# EAGLE board MainBoard_V4 (EAGLE 6.1)
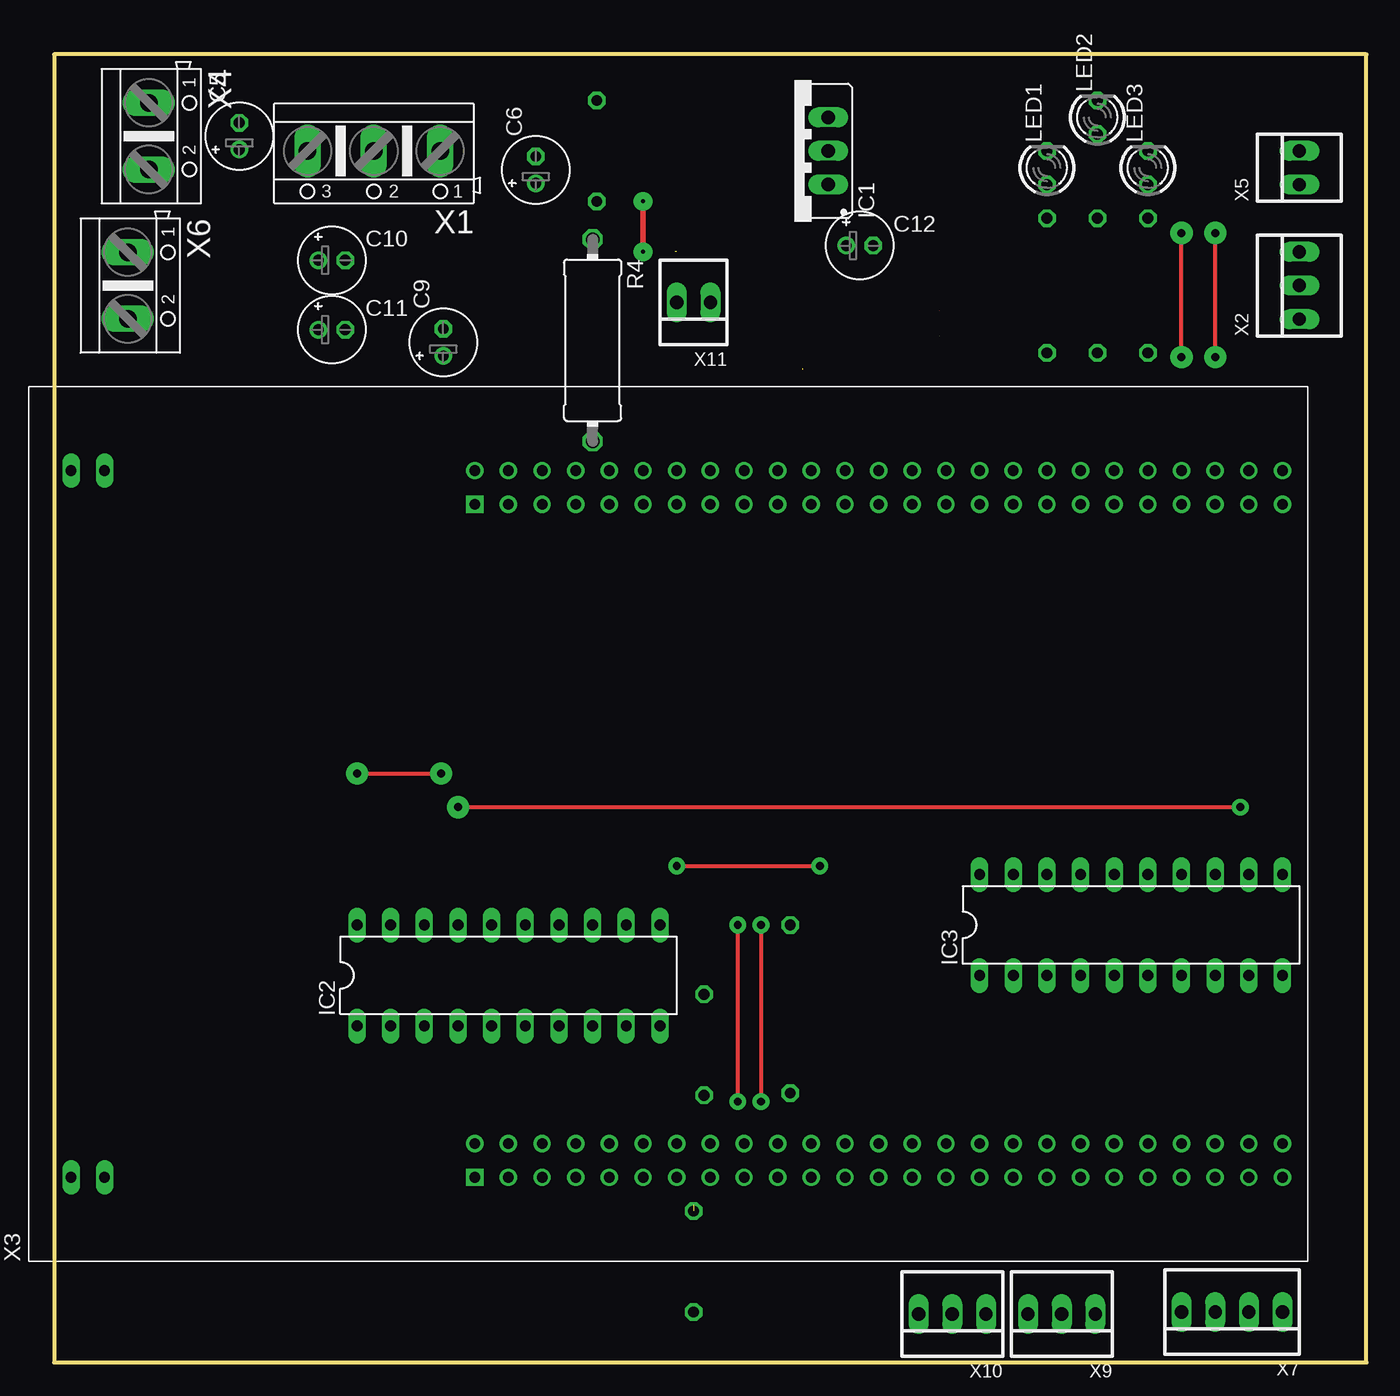
[diagram p0: board, top side]
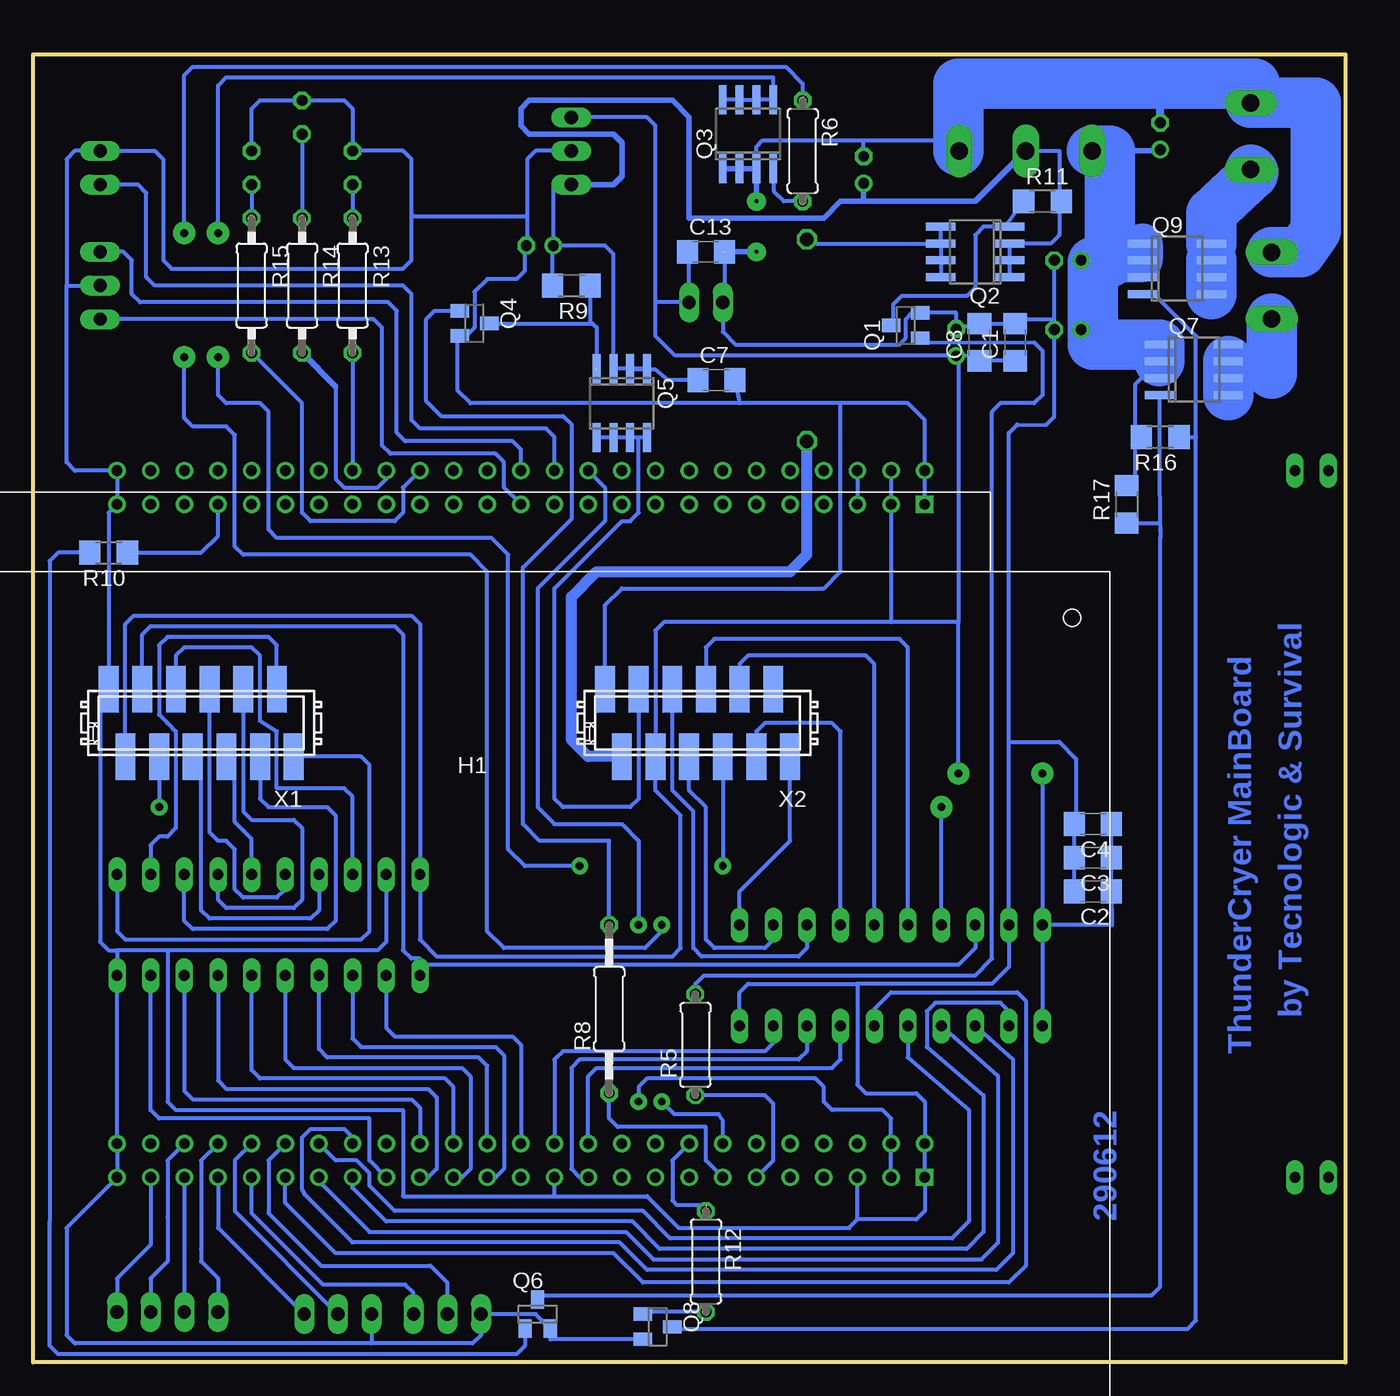
[diagram p1: board, bottom side, seen from below]

Size 99.04 x 98.73 mm. Coordinates in mm from the lower left corner, seen from the top.
Outline: 0,0 99.04,0 99.04,98.73 0,98.73 0,0
Copper layers (1*16): Top 0.035mm / dielectric 1.5mm / Bottom 0.035mm
Design rules: minimum track width 6mil, minimum drill 12mil, track to track 6mil, track to pad 6mil, pad to pad 6mil, via to via 6mil, smd to smd 0mil, copper to edge 10mil, drill to drill 10mil, minimum pad ring 10mil, minimum via ring 6mil, stop-mask expansion 2mil, vias tented up to drill 100mil, thermal gap 10mil

## Footprints (pad centres in the part's own frame; a part is rotated, then mirrored left to right if it is on the bottom)
C1206 = smd 1.6 x 1.8: 1 -1.4,0; 2 1.4,0
E2-5 = drill 0.813 pad 1.27: + -1.016,0 | drill 0.813 pad 1.27 octagon: - 1.016,0
YL24012-70-MICROMATCH = smd 1.5 x 3.5: 1 75.565,8.89; 2 74.295,13.97; 3 73.025,8.89; 4 71.755,13.97; 5 70.485,8.89; 6 69.215,13.97; 7 67.945,8.89; 8 66.675,13.97; 9 65.405,8.89; 10 64.135,13.97; 11 62.865,8.89; 12 61.595,13.97; 13 38.1,8.89; 14 36.83,13.97; 15 35.56,8.89; 16 34.29,13.97; 17 33.02,8.89; 18 31.75,13.97; 19 30.48,8.89; 20 29.21,13.97; 21 27.94,8.89; 22 26.67,13.97; 23 25.4,8.89; 24 24.13,13.97
78XXS = drill 1.016 long: GND 0,-2.54; IN -2.54,-2.54; OUT 2.54,-2.54
DIL20 = drill 0.813 long: 1 -11.43,-3.81; 2 -8.89,-3.81; 3 -6.35,-3.81; 4 -3.81,-3.81; 5 -1.27,-3.81; 6 1.27,-3.81; 7 3.81,-3.81; 8 6.35,-3.81; 9 8.89,-3.81; 10 11.43,-3.81; 11 11.43,3.81; 12 8.89,3.81; 13 6.35,3.81; 14 3.81,3.81; 15 1.27,3.81; 16 -1.27,3.81; 17 -3.81,3.81; 18 -6.35,3.81; 19 -8.89,3.81; 20 -11.43,3.81
LED3MM = drill 0.813 octagon: A -1.27,0; K 1.27,0
SOT23 = smd 1 x 1.4: 1 -0.95,-1.1; 2 0.95,-1.1; 3 0,1.1
SO-08 = smd 0.6 x 2.2: 1 -1.905,-2.6; 2 -0.635,-2.6; 3 0.635,-2.6; 4 1.905,-2.6; 5 1.905,2.6; 6 0.635,2.6; 7 -0.635,2.6; 8 -1.905,2.6
0414/15 = drill 1.016 octagon: 1 -7.62,0; 2 7.62,0
0207/7 = drill 0.813 octagon: 1 -3.81,0; 2 3.81,0
0207/12 = drill 0.813 octagon: 1 -6.35,0; 2 6.35,0
R1206 = smd 1.6 x 1.803: 1 -1.422,0; 2 1.422,0
0207/10 = drill 0.813 octagon: 1 -5.08,0; 2 5.08,0
AK500/3 = drill 1.321 long: 1 -5.004,0; 2 0,0; 3 5.004,0
22-23-2031 = drill 1 long: 1 -2.54,0; 2 0,0; 3 2.54,0
STM32F4_DISC = drill 0.8 square: L1 -27.94,30.48; R1 22.86,30.48 | drill 0.8: L2 -25.4,30.48; L3 -27.94,27.94; L4 -25.4,27.94; L5 -27.94,25.4; L6 -25.4,25.4; L7 -27.94,22.86; L8 -25.4,22.86; L9 -27.94,20.32; L10 -25.4,20.32; L11 -27.94,17.78; L12 -25.4,17.78; L13 -27.94,15.24; L14 -25.4,15.24; L15 -27.94,12.7; L16 -25.4,12.7; L17 -27.94,10.16; L18 -25.4,10.16; L19 -27.94,7.62; L20 -25.4,7.62; L21 -27.94,5.08; L22 -25.4,5.08; L23 -27.94,2.54; L24 -25.4,2.54; L25 -27.94,0; L26 -25.4,0; L27 -27.94,-2.54; L28 -25.4,-2.54; L29 -27.94,-5.08; L30 -25.4,-5.08; L31 -27.94,-7.62; L32 -25.4,-7.62; L33 -27.94,-10.16; L34 -25.4,-10.16; L35 -27.94,-12.7; L36 -25.4,-12.7; L37 -27.94,-15.24; L38 -25.4,-15.24; L39 -27.94,-17.78; L40 -25.4,-17.78; L41 -27.94,-20.32; L42 -25.4,-20.32; L43 -27.94,-22.86; L44 -25.4,-22.86; L45 -27.94,-25.4; L46 -25.4,-25.4; L47 -27.94,-27.94; L48 -25.4,-27.94; L49 -27.94,-30.48; L50 -25.4,-30.48; R2 25.4,30.48; R3 22.86,27.94; R4 25.4,27.94; R5 22.86,25.4; R6 25.4,25.4; R7 22.86,22.86; R8 25.4,22.86; R9 22.86,20.32; R10 25.4,20.32; R11 22.86,17.78; R12 25.4,17.78; R13 22.86,15.24; R14 25.4,15.24; R15 22.86,12.7; R16 25.4,12.7; R17 22.86,10.16; R18 25.4,10.16; R19 22.86,7.62; R20 25.4,7.62; R21 22.86,5.08; R22 25.4,5.08; R23 22.86,2.54; R24 25.4,2.54; R25 22.86,0; R26 25.4,0; R27 22.86,-2.54; R28 25.4,-2.54; R29 22.86,-5.08; R30 25.4,-5.08; R31 22.86,-7.62; R32 25.4,-7.62; R33 22.86,-10.16; R34 25.4,-10.16; R35 22.86,-12.7; R36 25.4,-12.7; R37 22.86,-15.24; R38 25.4,-15.24; R39 22.86,-17.78; R40 25.4,-17.78; R41 22.86,-20.32; R42 25.4,-20.32; R43 22.86,-22.86; R44 25.4,-22.86; R45 22.86,-25.4; R46 25.4,-25.4; R47 22.86,-27.94; R48 25.4,-27.94; R49 22.86,-30.48; R50 25.4,-30.48 | drill 0.8 long: T1 -27.94,60.96; T2 -27.94,58.42; T3 25.4,60.96; T4 25.4,58.42
AK500/2 = drill 1.321 long: 1 -2.515,0; 2 2.515,0
22-23-2021 = drill 1 long: 1 -1.27,0; 2 1.27,0
22-23-2041 = drill 1 long: 1 -3.81,0; 2 -1.27,0; 3 1.27,0; 4 3.81,0

## Placement (x,y rotation side)
C1  100n  [C1206]  24.92,76.99 90 bottom
C2  100n  [C1206]  19.05,35.56 180 bottom
C3  100n  [C1206]  19.05,38.1 180 bottom
C4  100n  [C1206]  19.05,40.64 180 bottom
C5  10µ  [E2-5]  13.97,92.55 90 top
C6  4µ7  [E2-5]  36.35,90.01 90 top
C7  100n  [C1206]  47.47,74.14 0 bottom
C8  100n  [C1206]  27.62,76.99 90 bottom
C9  4µ7  [E2-5]  29.37,76.99 90 top
C10  100µ  [E2-5]  20.95,83.19 0 top
C11  100µ  [E2-5]  20.95,77.95 0 top
C12  100µ  [E2-5]  60.8,84.3 0 top
C13  100n  [C1206]  48.26,83.82 0 bottom
H1  [YL24012-70-MICROMATCH]  17.78,59.69 180 bottom
IC1  78L05  [78XXS]  55.88,91.44 90 top
IC2  74AC245N  [DIL20]  34.29,29.21 0 top
IC3  74AC245N  [DIL20]  81.28,33.02 0 top
LED1  [LED3MM]  74.93,90.17 90 top
LED2  [LED3MM]  78.74,93.98 90 top
LED3  [LED3MM]  82.55,90.17 90 top
Q1  BSS123  [SOT23]  33.18,78.26 90 bottom
Q2  SI4427DY  [SO-08]  27.94,83.82 90 bottom
Q3  SI4466DY  [SO-08]  45.09,92.71 0 bottom
Q4  BSS123  [SOT23]  65.72,78.42 270 bottom
Q5  SI4427DY  [SO-08]  54.61,72.39 180 bottom
Q6  BSS123  [SOT23]  60.96,3.65 0 bottom
Q7  SI4427DY  [SO-08]  11.43,74.93 270 bottom
Q8  BSS123  [SOT23]  51.91,2.7 270 bottom
Q9  SI4427DY  [SO-08]  12.7,82.55 270 bottom
R4  10R  [0414/15]  40.64,77.15 270 top
R5  1k  [0207/7]  49.05,23.97 90 bottom
R6  1k  [0207/7]  40.96,91.44 270 bottom
R8  1k  [0207/12]  55.56,26.67 90 bottom
R9  1k  [R1206]  58.42,81.28 180 bottom
R10  1k  [R1206]  93.34,61.12 180 bottom
R11  1k  [R1206]  22.86,87.63 0 bottom
R12  1k  [0207/7]  48.26,7.62 270 bottom
R13  1k  [0207/10]  74.93,81.28 270 bottom
R14  1k  [0207/10]  78.74,81.28 270 bottom
R15  1k  [0207/10]  82.55,81.28 270 bottom
R16  10k  [R1206]  13.97,69.85 180 bottom
R17  10k  [R1206]  16.51,64.77 90 bottom
X1  PWR  [AK500/3]  24.13,91.44 180 top
X2  22-23-2031  [22-23-2031]  93.98,81.28 90 top
X3  STM32F4_DISC  [STM32F4_DISC]  62.23,41.91 90 top
X4  OUT1  [AK500/2]  7.14,92.55 270 top
X5  22-23-2021  [22-23-2021]  93.98,90.17 90 top
X6  OUT2  [AK500/2]  5.56,81.28 270 top
X7  TouchIN  [22-23-2041]  88.9,3.81 180 top
X9  PD1011  [22-23-2031]  76.04,3.65 180 top
X10  PD89  [22-23-2031]  67.79,3.65 180 top
X11  TouchPWR  [22-23-2021]  48.26,80.01 180 top

## Library data of the parts
C1-C13 R4-R6 R8-R17 = rcl
H1 = GLCD-YL240
IC1 = v-reg
IC2 IC3 = 74xx-eu
LED1-LED3 = led
Q1 Q4 Q6 Q8 = transistor-small-signal
Q2 Q3 Q5 Q7 Q9 = transistor-power
X1 X4 X6 = con-ptr500; OC_FARNELL: unknown; OC_NEWARK: unknown
X2 X9 X10 = con-molex; MF: MOLEX; MPN: 22-23-2031; OC_FARNELL: 1462950; OC_NEWARK: 30C0862
X3 = stm32f4_disc
X5 X11 = con-molex; MF: MOLEX; MPN: 22-23-2021; OC_FARNELL: 1462926; OC_NEWARK: 25C3832
X7 = con-molex; MF: MOLEX; MPN: 22-23-2041; OC_FARNELL: 1462920; OC_NEWARK: 38C0355

## Nets
3V3: X3.R5 X3.R6
!CE: H1.21 IC2.15
!RD: H1.3 IC2.18 IC3.1
!RST: H1.19 IC2.16
!WR: H1.4 IC2.17
+5V: C1.1 C2.1 C3.1 C4.1 C8.1 C9.+ C13.1 H1.2 H1.16 IC1.OUT IC2.1 IC2.20 IC3.20 X3.R3 X3.R4 X11.1
+12V: C6.+ C7.1 C12.+ IC1.IN Q2.1 Q2.2 Q2.3 Q5.1 Q5.2 Q5.3 R9.2 R11.2 X1.2
+24V: C5.+ C10.+ C11.+ Q7.1 Q7.2 Q7.3 Q9.1 Q9.2 Q9.3 R16.2 R17.2 X1.3
A0: H1.17 IC2.13
A1: H1.18 IC2.12
A2: H1.24 IC2.11
BL: H1.14 R4.2
BUZZ: H1.20 Q3.5 Q3.6 Q3.7 Q3.8
C/D: H1.22 IC2.14
D0: H1.5 IC3.18
D1: H1.6 IC3.17
D2: H1.7 IC3.16
D3: H1.8 IC3.15
D4: H1.9 IC3.14
D5: H1.10 IC3.13
D6: H1.11 IC3.12
D7: H1.12 IC3.11
ENC_A: X2.1 X3.R25
ENC_B: X2.3 X3.R26
ENC_UB: X3.R24 X5.1
GND: C1.2 C2.2 C3.2 C4.2 C5.- C6.- C7.2 C8.2 C9.- C10.- C11.- C12.- C13.2 H1.1 H1.13 IC1.GND IC2.10 IC2.19 IC3.10 IC3.19 LED1.K LED2.K LED3.K Q1.2 Q3.1 Q3.2 Q3.3 Q4.2 Q6.2 Q8.2 X1.1 X2.2 X3.L1 X3.L2 X3.L5 X3.L23 X3.L49 X3.L50 X3.R1 X3.R2 X3.R49 X3.R50 X4.1 X5.2 X6.1 X9.3 X10.3 X11.2
IN_!CE: IC2.5 X3.L38
IN_!RD: IC2.2 X3.L35
IN_!RST: IC2.4 X3.L37
IN_!WR: IC2.3 X3.L36
IN_A0: IC2.7 X3.L22
IN_A1: IC2.8 X3.L21
IN_A2: IC2.9 X3.L24
IN_BL: R5.1 X3.L11
IN_BUZZ: R6.1 X3.L14
IN_C/D: IC2.6 X3.L39
IN_D0: IC3.2 X3.L26
IN_D1: IC3.3 X3.L27
IN_D2: IC3.4 X3.L28
IN_D3: IC3.5 X3.L29
IN_D4: IC3.6 X3.L30
IN_D5: IC3.7 X3.L31
IN_D6: IC3.8 X3.L32
IN_D7: IC3.9 X3.L33
IN_LED: R8.1 X3.L13
IN_OUT1: R12.1 X3.L16
IN_OUT2: R10.1 X3.R43
LED: H1.15 Q5.5 Q5.6 Q5.7 Q5.8
LED1: Q7.5 Q7.6 Q7.7 Q7.8 X6.2
LED2: Q9.5 Q9.6 Q9.7 Q9.8 X4.2
N$1: R15.2 X3.R32
N$2: R14.2 X3.R34
N$4: Q1.3 Q2.4 R11.1
N$5: Q2.5 Q2.6 Q2.7 Q2.8 R4.1
N$6: Q1.1 R5.2
N$7: Q4.3 Q5.4 R9.1
N$8: Q3.4 R6.2
N$11: Q4.1 R8.2
N$12: Q6.3 Q7.4 R17.1
N$13: Q6.1 R10.2
N$15: Q8.3 Q9.4 R16.1
N$16: Q8.1 R12.2
N$17: LED1.A R13.1
N$18: LED2.A R14.1
N$19: LED3.A R15.1
N$20: X3.L40 X10.2
N$21: X3.L41 X10.1
N$22: X3.L42 X9.2
N$23: X3.L43 X9.1
N$24: X3.L44 X7.4
N$25: X3.L45 X7.3
N$26: X3.L46 X7.2
N$27: X3.L47 X7.1
N$28: R13.2 X3.R36
VBAT: H1.23
VDD: X3.L3 X3.L4 X3.R22

## Tracks (layer width: path | path; a pad name or v marks a point on that pad's centre or on a via)
3V3
  Bottom 0.305: X3.R6 X3.R5
!CE
  Bottom 0.305: IC2.15 35.56,52.7 36.2,53.34 45.09,53.34 45.72,52.7 H1.21
!RD
  Bottom 0.305: IC2.18 27.94,31.27 29.21,30 69.85,30 IC3.1 69.85,30.48 70.48,30.48 71.12,31.11 71.12,54.93 71.75,55.56 90.17,55.56 90.81,54.93 H1.3
!RST
  Bottom 0.305: IC2.16 33.02,53.98 33.66,54.61 47.62,54.61 48.26,53.98 H1.19
!WR  (via drill 0.6 pad 1.27, 0.6 pad 1.68)
  Top 0.305: v30.48,41.91 v89.53,41.91
  Bottom 0.305: IC2.17 v30.48,41.91 | H1.4 v89.53,41.91
+5V  (via drill 0.6 pad 1.68)
  Top 0.305: v22.86,44.45 v29.21,44.45
  Bottom 0.305: IC2.20 IC2.1 | X3.R4 X3.R3 34.29,55.88 | 34.29,55.88 51.44,55.88 52.07,55.24 H1.16 52.07,43.18 50.16,41.27 50.16,31.27 50.8,30.64 68.58,30.64 69.85,31.91 IC3.20 69.85,55.72 70.48,56.36 91.44,56.36 92.08,55.72 H1.2 | v22.86,44.45 IC2.20 | 29.46,76.2 C9.+ 27.56,75.91 C8.1 C1.1 | C4.1 C3.1 C2.1 17.62,33.02 IC2.20 | 52.07,80.01 52.07,77.47 50.64,76.04 29.37,76.04 29.46,76.14 29.46,76.2 | 52.07,80.01 52.07,93.34 52.7,93.98 IC1.OUT | 29.46,76.2 29.21,75.95 29.21,55.88 | 29.21,55.88 34.29,55.88 | v29.21,44.45 29.21,55.88 | C13.1 49.53,83.69 X11.1 52.07,80.01
+12V
  Bottom 0.305: 49.53,73.66 C7.1 51.12,74.14 52.07,74.93 53.91,74.93 Q5.1 Q5.2 Q5.3 55.24,83.66 55.88,84.3 59.53,84.3 59.59,84.23 59.85,84.23 C12.+ | IC1.IN 59.78,88.81 C12.+ | X1.2 21.59,91.44 21.59,87.63 | 21.59,87.63 21.59,85.09 22.23,84.45 Q2.3 Q2.2 Q2.1 | R9.2 59.84,84.14 | 59.84,84.14 59.69,84.3 | 59.84,84.14 59.84,84.24 C12.+ | R11.2 21.59,87.63
  Bottom 0.406: IC1.IN 55.24,88.9 54.61,89.53 54.61,92.08 55.24,92.71 61.59,92.71 62.23,93.34 62.23,94.61 61.59,95.25 50.8,95.25 49.53,93.98 49.53,86.36 39.37,86.36 38.1,87.63 36.35,87.63 | X1.2 27.94,87.63 36.35,87.63 | C6.+ 36.35,87.63
+24V
  Bottom 0.305: Q9.2 Q9.3 | Q7.2 Q7.3 15.4,74.3 15.88,73.82 15.88,70.33 R16.2 15.72,69.85 15.88,69.69 15.88,66.83 R17.2 | 17.78,83.03 Q9.1
  Bottom 0.406: C5.+ 14.13,91.44 17.78,91.44
  Bottom 0.61: C10.+ 19.05,82.55 | C11.+ 19.05,77.47
  Bottom 3: Q9.1 Q9.2 | 19.05,76.83 19.05,77.47 | 19.05,82.55 19.05,83.03 | 17.78,83.03 15.4,83.03
  Bottom 3.81: Q7.2 Q7.1 19.05,76.83 | X1.3 17.78,91.44 17.78,83.03 19.05,83.03 | 19.05,77.47 19.05,82.55
A0
  Bottom 0.305: IC2.13 40.64,31.27 41.27,30.64 48.58,30.64 49.21,31.27 49.21,41.59 50.8,43.18 H1.17
A1
  Bottom 0.305: IC2.12 43.18,31.91 43.81,31.27 47.62,31.27 48.26,31.91 48.26,41.91 49.53,43.18 H1.18
A2
  Bottom 0.305: IC2.11 45.72,35.56 41.91,39.37 H1.24
BL
  Bottom 0.305: R4.2 40.64,69.59 40.45,68.77 R4.2
  Bottom 0.813: H1.14 57.15,45.72 58.42,46.99 58.42,57.78 56.52,59.69 41.91,59.69 40.64,60.96 R4.2
BUZZ  (via drill 0.6 pad 1.27, 0.6 pad 1.68)
  Top 0.305: v46.99,37.47 v57.78,37.47 | v85.09,75.88 v85.09,85.25
  Bottom 0.305: Q3.8 Q3.7 Q3.6 Q3.5 43.18,97 84.45,97 85.09,96.36 v85.09,85.25 | H1.20 v46.99,37.47 | v57.78,37.47 61.91,37.47 63.18,38.73 63.18,60.96 64.45,62.23 80.64,62.23 81.28,62.87 81.28,71.75 81.92,72.39 84.45,72.39 85.09,73.03 v85.09,75.88
C/D
  Bottom 0.305: IC2.14 38.1,47.62 38.73,48.26 43.81,48.26 44.45,47.62 H1.22
D0
  Bottom 0.305: IC3.18 74.93,42.7 75.56,43.34 80.64,43.34 80.64,47.62 81.92,48.42 81.92,53.34 82.55,53.98 87.63,53.98 88.27,53.34 H1.5
D1
  Bottom 0.305: IC3.17 77.47,34.13 78.11,33.5 85.72,33.5 86.36,34.13 86.36,45.72 H1.6
D2
  Bottom 0.305: IC3.16 80.01,35.72 80.64,35.08 83.19,35.08 83.82,35.72 83.82,38.73 84.45,39.37 85.09,39.37 85.72,40.01 H1.7
D3
  Bottom 0.305: IC3.15 82.55,39.53 83.19,40.16 83.82,40.8 83.82,45.72 H1.8
D4
  Bottom 0.305: H1.9 83.19,41.59 82.55,40.96 79.38,40.96 78.74,40.32 78.74,34.92 79.38,34.29 84.45,34.29 85.09,34.92 IC3.14
D5
  Bottom 0.305: H1.10 81.92,42.55 81.28,41.91 76.83,41.91 76.2,41.27 76.2,33.34 76.83,32.7 87,32.7 87.63,33.34 IC3.13
D6
  Bottom 0.305: H1.11 80.64,54.13 81.28,54.77 88.9,54.77 89.53,54.13 89.53,48.9 88.9,48.26 88.27,47.62 88.27,40.32 88.9,39.69 89.53,39.69 90.17,39.05 IC3.12
D7
  Bottom 0.305: IC3.11 92.71,32.54 92.08,31.91 74.3,31.91 73.66,32.54 73.66,45.09 74.3,45.72 H1.12 79.53,45.72
ENC_A
  Bottom 0.305: X3.R25 63.5,66.04 63.5,67.94 64.14,68.58 72.07,68.58 72.71,69.22 72.71,78.11 73.34,78.74 X2.1
ENC_B
  Bottom 0.305: X3.R26 62.23,68.9 62.87,69.53 70.96,69.53 71.6,70.17 71.6,79.38 72.23,80.01 90.96,80.01 91.6,80.64 91.6,83.19 92.23,83.82 X2.3
ENC_UB
  Bottom 0.305: X3.R24 59.69,69.85 60.33,70.48 69.85,70.48 70.48,71.12 70.48,80.64 71.12,81.28 89.85,81.28 90.49,81.92 90.49,88.27 91.12,88.9 X5.1
GND  (via drill 0.3 pad 1.42)  (2 unrouted)
  Top 0.406: v44.45,87.63 v44.45,83.82
  Bottom 0.152: Q3.1 Q3.3 44.45,90.17
  Bottom 0.305: 36.83,10.79 32.38,10.79 31.75,11.43 X3.L1 X3.L2 31.75,19.68 32.38,20.32 36.2,20.32 36.83,20.95 36.83,28.57 | 36.83,10.79 37.47,10.16 50.32,10.16 52.7,12.54 59.69,12.54 | 36.83,10.79 X3.L5 | X3.R2 X3.R1 31.75,71.12 33.02,72.39 38.1,72.39 | 45.72,72.39 66.04,72.39 66.99,73.34 66.99,77.31 66.83,77.47 66.83,77.63 66.67,77.47 66.36,77.47 65.72,78.11 65.72,80.8 64.76,81.77 62.55,81.77 61.91,82.4 61.91,84.3 C12.- 61.75,84.3 61.75,86.52 | C7.2 45.72,72.39 | Q3.1 Q3.2 Q3.3 44.45,90.17 44.45,91.76 43.97,92.23 36.35,92.23 | IC1.GND 61.12,91.44 61.75,90.81 61.75,86.52 | H1.13 55.88,57.15 54.61,58.42 39.37,58.42 38.1,59.69 38.1,72.39 | 36.83,28.57 26.67,28.57 25.4,29.84 IC2.19 25.4,46.83 | IC2.10 45.72,27.94 45.09,28.57 36.83,28.57 | 59.69,12.54 X3.L23 | 92.71,31.11 93.34,31.11 93.98,31.75 93.98,50.16 H1.1 93.34,64.14 X3.R49 X3.R50 95.89,67.31 96.52,67.94 96.52,81.28 | 92.71,31.11 IC3.10 X3.L50 X3.L49 96.52,10.16 96.52,2.06 95.89,1.43 73.5,1.43 | 88.9,31.11 88.9,19.68 88.27,19.05 71.12,19.05 71.12,12.54 59.69,12.54 | 88.9,31.11 92.71,31.11 | IC3.19 72.39,31.75 73.03,31.11 88.9,31.11 | X9.3 73.5,1.43 | 73.5,1.43 65.88,1.43 65.25,2.06 X10.3 61.11,3.65 Q6.2 60.01,1.75 58.1,1.75 Q8.2 | C2.2 C3.2 C4.2 20.32,40.64 20.32,45.56 21.59,46.83 25.4,46.83 | 7.12,95.09 X4.1 6.83,95.09 | 96.52,81.28 96.52,90.81 95.89,91.44 X5.2 89.85,91.44 89.22,90.81 89.22,83.19 88.58,82.55 71.12,82.55 70.48,83.19 70.48,86.52 70.33,86.52 | 96.52,81.28 X2.2 | 25.4,46.83 25.4,70.16 24.76,70.8 22.61,70.75 21.97,71.38 C11.- 21.97,78.74 | 21.97,78.74 C10.- | 70.33,86.52 61.75,86.52 | LED3.K 82.55,94.61 81.92,95.25 LED2.K 75.56,95.25 74.93,94.61 LED1.K 71.12,91.44 70.48,90.81 70.48,86.68 70.33,86.52
  Bottom 0.305: C13.2 46.86,80.14 X11.2 46.99,77.79 46.04,76.83 33.66,76.83 33.18,77.31 33.18,78.74 32.7,79.22 Q1.2 29.37,79.22 C9.- 27.94,78.42 27.65,78.45 C8.2 C1.2 24.48,78.39 24.45,78.42 24.38,78.36 24.92,78.74 21.97,78.74 | 38.1,72.39 45.72,72.39 | 36.35,92.23 28.73,92.23 28.66,92.23 | C6.- 36.35,92.23
  Bottom 0.406: 28.73,92.23 29.21,91.44 X1.1 | Q3.1 Q3.3 44.45,90.17 v44.45,87.63 | v44.45,83.82 46.99,83.82
  Bottom 0.61: C5.- 13.97,96.52
  Bottom 3: 6.83,96.52 6.83,95.09
  Bottom 3.81: X6.1 3.36,83.8 2.22,85.41 2.22,95.09 7.12,95.09 | 29.21,91.44 29.21,96.52 13.97,96.52 6.83,96.52
IN_!CE
  Bottom 0.305: IC2.5 33.02,23.02 28.42,19.05 28.42,10.64 29.69,9.37 50.96,9.37 53.02,11.43 71.75,11.43 73.66,13.34 73.66,14.29 74.61,15.24 76.2,15.24 X3.L38
IN_!RD
  Bottom 0.305: IC2.2 25.4,26.51 26.04,27.15 30.96,27.15 31.59,26.51 31.59,23.81 30.48,22.86 27.3,20.16 27.3,9.84 28.57,8.57 51.75,8.57 53.82,10.64 72.39,10.64 74.93,13.18 X3.L35
IN_!RST
  Bottom 0.305: X3.L37 77.47,13.65 73.66,9.84 54.29,9.84 52.23,7.78 27.46,7.78 26.19,9.05 26.19,21.59 IC2.4
IN_!WR
  Bottom 0.305: IC2.3 25.08,22.86 25.08,8.26 26.35,6.99 52.7,6.99 54.77,9.05 74.93,9.05 78.55,12.67 78.74,13.12 78.74,16.99 78.11,17.62 75.56,17.62 74.93,16.99 X3.L36
IN_A0
  Bottom 0.305: X3.L22 57.15,21.59 56.52,22.23 38.73,22.23 38.1,22.86 IC2.7
IN_A1
  Bottom 0.305: IC2.8 40.64,23.5 41.27,22.86 57.78,22.86 58.42,22.23 58.42,14.61 57.78,13.97 X3.L21
IN_A2
  Bottom 0.305: IC2.9 43.18,24.13 43.81,23.5 59.05,23.5 59.69,22.86 X3.L24
IN_BL
  Bottom 0.305: X3.L11 43.18,15.24 43.18,19.53 43.81,20.16 R5.1
IN_BUZZ  (via drill 0.6 pad 1.27, 0.6 pad 1.68)
  Top 0.305: v51.59,19.68 v51.59,33.02 | v87.63,75.88 v87.63,85.25
  Bottom 0.305: R6.1 40.96,96.52 42.23,97.79 87,97.79 87.63,97.16 v87.63,85.25 | X3.L14 46.99,18.26 47.31,18.73 50.64,18.73 v51.59,19.68 | v51.59,33.02 51.59,32.54 52.86,31.27 63.5,31.27 64.77,32.54 64.77,59.69 66.04,60.96 83.19,60.96 83.82,61.59 83.82,70.01 84.45,70.64 87,70.64 87.63,71.28 v87.63,75.88
IN_C/D
  Bottom 0.305: IC2.6 35.56,26.67 34.29,27.94 24.77,27.94 24.13,27.3 24.13,7.3 25.4,6.03 53.02,6.03 55.24,8.26 76.2,8.26 80.01,12.06 X3.L39
IN_D0
  Bottom 0.305: IC3.2 72.39,25.24 71.75,24.61 62.87,24.61 62.23,23.97 X3.L26
IN_D1
  Bottom 0.305: IC3.3 74.93,24.45 74.3,23.81 64.14,23.81 63.5,23.18 63.5,14.61 64.14,13.97 X3.L27
IN_D2
  Bottom 0.305: X3.L28 64.77,22.38 65.41,23.02 76.83,23.02 77.47,23.65 IC3.4
IN_D3
  Bottom 0.305: IC3.5 80.01,22.86 79.38,22.23 66.67,22.23 66.04,21.59 66.04,14.61 66.67,13.97 X3.L29
IN_D4
  Bottom 0.305: X3.L30 67.31,20.8 67.94,21.43 81.92,21.43 82.55,22.07 IC3.6
IN_D5
  Bottom 0.305: IC3.7 85.09,21.27 84.45,20.64 69.22,20.64 68.58,20 68.58,14.61 69.22,13.97 X3.L31
IN_D6
  Bottom 0.305: IC3.8 87.63,20.48 87,19.84 70.48,19.84 69.85,19.21 X3.L32
IN_D7
  Bottom 0.305: X3.L33 73.66,15.24 73.66,18.41 89.53,18.41 90.17,19.05 IC3.9
IN_LED
  Bottom 0.305: X3.L13 48.26,15.24 48.26,17.78 54.93,17.78 55.56,18.41 R8.1
IN_OUT1  (1 unrouted)
  Bottom 0.305: X3.L16 50.8,15.24 50.8,12.22 50.48,11.91 48.26,11.91
IN_OUT2
  Bottom 0.305: R10.1 86.36,61.12 85.09,62.39 X3.R43
LED
  Bottom 0.305: Q5.5 Q5.6 Q5.7 Q5.8 53.34,69.79 53.34,64.14 53.98,63.5 54.61,63.5 59.69,58.42 59.69,42.55 59.05,41.91 53.98,41.91 53.34,42.55 H1.15
LED1
  Bottom 0.61: 5.4,74.3 5.56,74.61 Q7.6
  Bottom 0.813: Q7.8 Q7.7
  Bottom 3.81: Q7.7 Q7.6 Q7.5 | X6.2 5.56,74.61
LED2
  Bottom 0.305: 6.99,89.69 6.96,89.85
  Bottom 3: Q9.7 Q9.8
  Bottom 3.81: Q9.5 Q9.6 Q9.7 | Q9.8 10.1,86.74 6.99,89.69 | 6.96,89.85 X4.2
N$1
  Bottom 0.305: X3.R32 71.12,66.04 71.12,64.14 71.75,63.5 78.11,63.5 78.74,64.14 78.74,72.39 R15.2
N$2
  Bottom 0.305: 76.2,73.66 76.2,66.67 75.56,66.04 73.03,66.04 72.39,66.67 X3.R34
  Bottom 0.406: 76.2,73.66 R14.2
N$4
  Bottom 0.305: R11.1 25.55,85.94 Q2.4 27.3,85.72 27.94,85.09 27.94,81.12 28.57,80.49 33.5,80.49 34.13,79.85 34.13,78.41 Q1.3
N$5
  Bottom 0.305: R4.1 40.32,84.77 40.48,84.45 Q2.6 | Q2.6 Q2.5 | Q2.6 30.48,84.39 30.48,83.25 Q2.7 Q2.8
N$6
  Bottom 0.305: Q1.1 31.76,76.99 23.5,76.99 22.86,76.36 22.86,73.03 23.5,72.39 26.04,72.39 26.67,71.75 26.67,30.48 27.94,29.21 48.42,29.21 49.05,28.57 R5.2
N$7  (1 unrouted)
  Bottom 0.305: Q4.3 56.99,78.42 | 56.99,78.42 56.83,78.42 56.52,78.11 56.52,74.93 | R9.1 57,78.43 56.99,78.42
N$8
  Bottom 0.305: R6.2 42.39,87.63 43.12,88.36 Q3.4
N$11  (1 unrouted)
  Bottom 0.305: R8.2 55.56,39.37 60.8,39.37 62.07,40.64 62.07,60.01 58.42,63.66 58.42,70.8 59.05,71.44 68.26,71.44 69.37,72.55 69.37,78.74 68.74,79.38 66.83,79.38
N$12
  Bottom 0.305: Q6.3 60.96,5.08 14.61,5.08 13.97,5.71 13.97,61.91 13.98,62.23 13.98,62.86 13.98,63.34 | Q7.4 14.03,67.37 13.98,63.34 | R17.1 13.99,63.35 13.98,63.34
N$13
  Bottom 0.305: R10.2 97.16,61.12 97.8,60.49 97.79,10.64 97.79,1.27 97.16,0.64 62.55,0.63 61.91,1.27 Q6.1
N$15
  Bottom 0.305: Q8.3 50.88,2.7 50.81,2.57 Q8.3 | Q8.3 50.8,2.69 50.8,2.54 11.91,2.54 11.27,3.17 11.27,69.85 | 11.27,69.85 11.27,77.47 14.45,80.64 Q9.4 | R16.1 11.27,69.85
N$16
  Bottom 0.305: R12.2 53.34,3.81 53.19,3.66 Q8.1
N$17
  Bottom 0.305: LED1.A R13.1
N$18
  Bottom 0.305: LED2.A R14.1
N$19
  Bottom 0.305: LED3.A R15.1
N$20
  Bottom 0.305: X3.L40 81.28,15.24 81.28,11.27 77.31,7.3 69.06,7.3 67.79,6.03 X10.2
N$21
  Bottom 0.305: X10.1 70.33,5.24 70.96,5.87 77.15,5.87 82.55,11.27 X3.L41
N$22
  Bottom 0.305: X3.L42 83.82,15.24 83.82,11.43 X9.2
N$23
  Bottom 0.305: X3.L43 85.09,10.16 X9.1
N$24
  Bottom 0.305: X3.L44 86.36,15.24 86.36,8.57 86.36,7.62 85.09,6.35 X7.4
N$25
  Bottom 0.305: X3.L45 87.63,7.46 X7.3
N$26
  Bottom 0.305: X3.L46 88.9,15.24 88.9,10.95 88.9,7.62 90.17,6.35 X7.2
N$27
  Bottom 0.305: X3.L47 90.17,8.89 92.71,6.35 X7.1
N$28
  Bottom 0.305: R13.2 X3.R36
VDD  (via drill 0.6 pad 1.27)
  Top 0.305: v53.34,33.02 v53.34,19.68
  Bottom 0.305: X3.L3 X3.L4 34.29,18.41 34.92,19.05 38.73,19.05 39.37,19.68 39.37,20.8 40.01,21.43 52.7,21.43 53.34,20.8 v53.34,19.68 | v53.34,33.02 53.34,39.37 54.61,40.64 59.69,40.64 60.96,41.91 60.96,58.42 55.88,63.5 55.88,66.04 X3.R22

## Text on the board
Bottom: by Tecnologic & Survival | ThunderCryer MainBoard | 290612